# Altium PCB BOARD.PcbDoc
Units mil, origin at the board's own origin, x right, y up, seen from the top; angles counter-clockwise.
Board outline 615 x 1965 mil, 4 copper layers (Component Side, Signal Layer 1, Signal Layer 2, Solder Side), stack 33.234 mil thick; 56 components, 35 nets, 160 pads, 33 vias.
Unrouted connection lines stored in the file: 1.
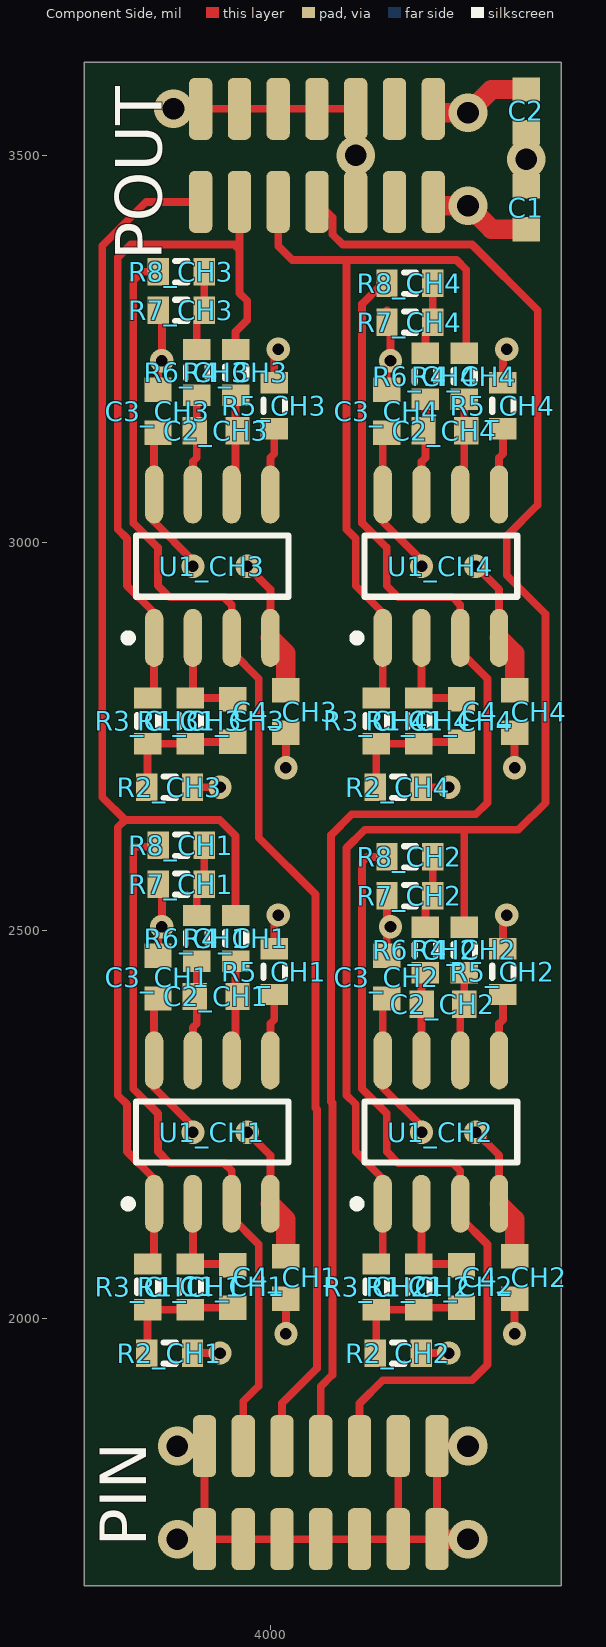
[diagram p0: Component Side view]
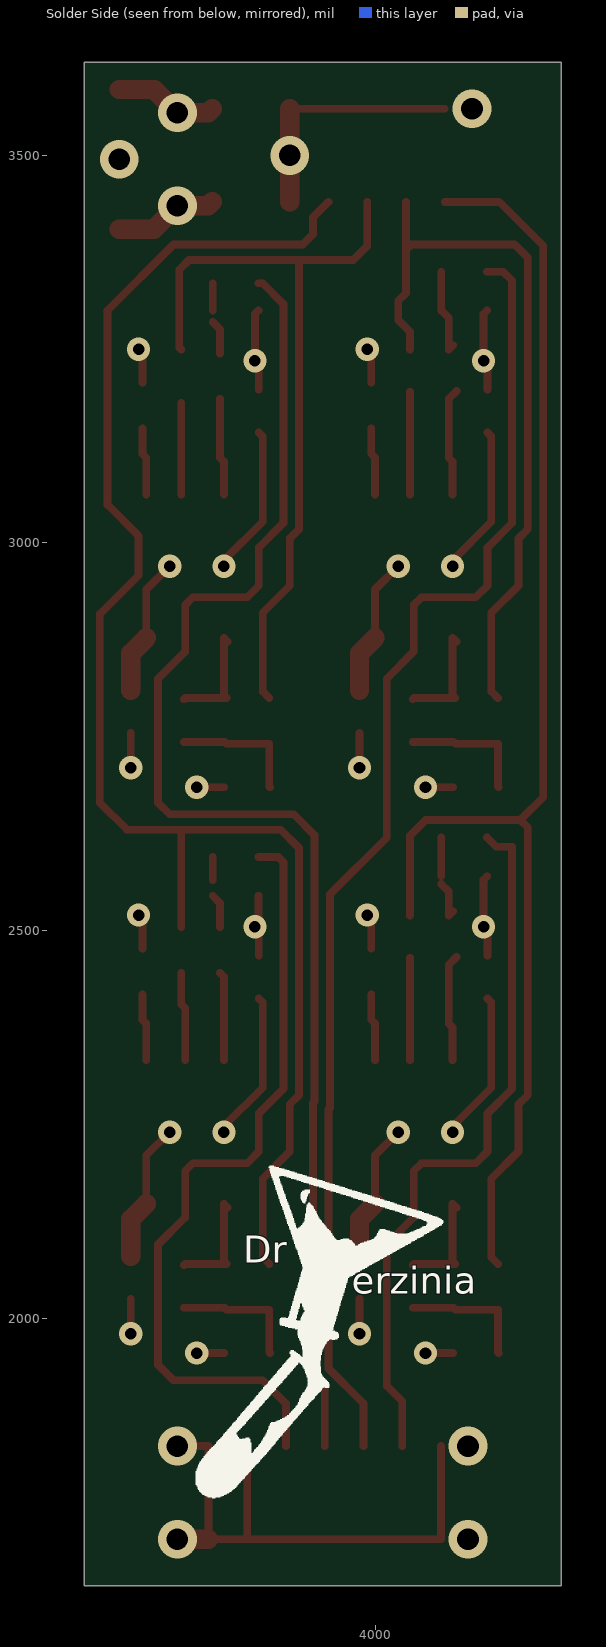
[diagram p1: Solder Side view, seen from below]
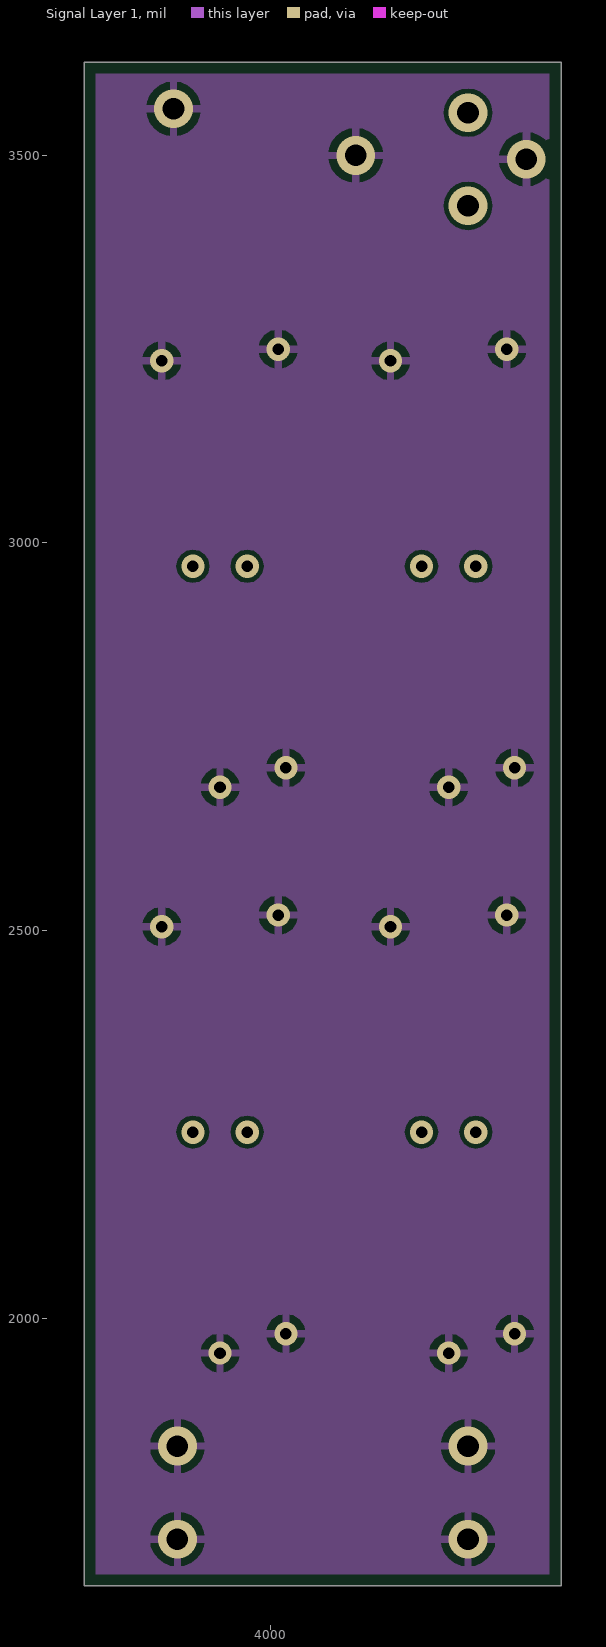
[diagram p2: Signal Layer 1]
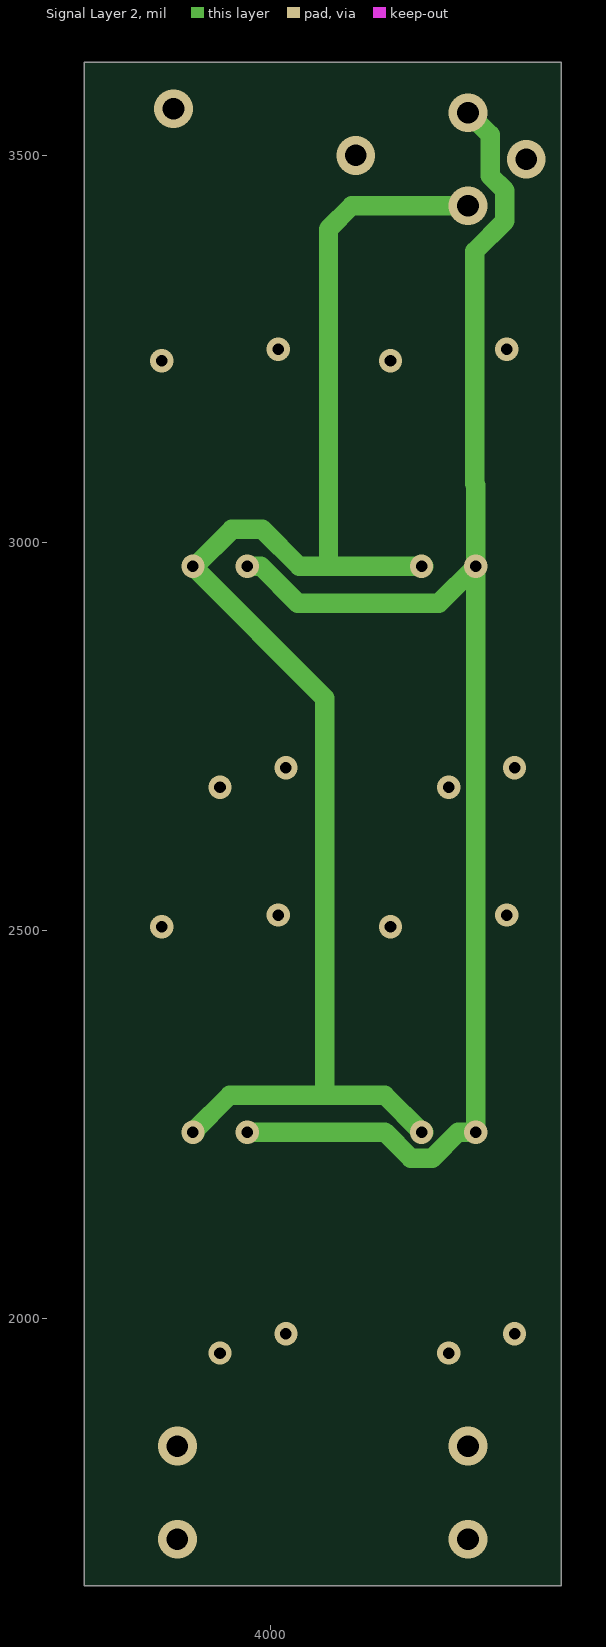
[diagram p3: Signal Layer 2]

## Layer stack, top to bottom
Top Solder: solder mask 0.4, Solder Resist, Dk 3.5
Component Side: signal copper 1.4
Dielectric 1: core 12.6, FR-4, Dk 4.8
Signal Layer 1: signal copper 1.417
Dielectric 3: prepreg 5, Dk 4.2
Signal Layer 2: signal copper 1.417
Dielectric 4: core 10, Dk 4.2
Solder Side: signal copper 1.4
Bottom Solder: solder mask 0.4, Solder Resist, Dk 3.5

## Board outline
3760,1655 3760,3620 4375,3620 4375,1655

## Design rules (kind name [scope] priority, off if disabled: settings)
Clearance [All] p1: gap=6 ignorepadtopadclearanceinfootprint=FALSE except(0: Arc-Hole Track-Hole SMDPad-Hole THPad-Hole Via-Hole Fill-Hole Poly-Hole Region-Hole Text-Hole)
PolygonConnect [All] p1: connectstyle=Relief reliefconductorwidth=10 reliefentries=4 polygonreliefangle="90 Angle" airgapwidth=10
RoomDefinition BOARD [InComponentClass('BOARD')] p1: confinementstyle=ConfineIn formatcopy=TRUE lockcomponents=FALSE outline 3760,3750 3495,3750 3495,3620 3760,3620
RoomDefinition CH4 [InComponentClass('CH4')] p2: confinementstyle=ConfineIn formatcopy=TRUE lockcomponents=FALSE outline 4075,2650 4345,2650 4345,3355 4075,3355
RoomDefinition U_CONNECTORS [InComponentClass('U_CONNECTORS')] p3: confinementstyle=ConfineIn formatcopy=TRUE lockcomponents=FALSE outline 3760,3480 3490,3480 3490,3620 3760,3620
RoomDefinition CH3 [InComponentClass('CH3')] p4: confinementstyle=ConfineIn formatcopy=TRUE lockcomponents=FALSE outline 3780,2650 4050,2650 4050,3355 3780,3355
RoomDefinition CH2 [InComponentClass('CH2')] p5: confinementstyle=ConfineIn formatcopy=TRUE lockcomponents=FALSE outline 4075,1920 4345,1920 4345,2625 4075,2625
RoomDefinition CH1 [InComponentClass('CH1')] p6: confinementstyle=ConfineIn formatcopy=TRUE lockcomponents=FALSE outline 3780,1920 4050,1920 4050,2625 3780,2625
RoutingVias [All] p1: holewidth=28 width=50 viastyle="Through Hole" minholewidth=10 minwidth=20 maxholewidth=28 maxwidth=50
SolderMaskExpansion [All] p1: expansion=4
Width [All] p1: maxlimit=30 minlimit=10 preferedwidth=30 toplayer_prefwidth=10 midlayer1_prefwidth=10 bottomlayer_prefwidth=10 minimp=50.000000 maximp=50.000000 favimp=50.000000
30 further rules are at their usual default settings.

## Classes and differential pairs
component class BOARD: C1 C2
component class CH1: C1_CH1 C2_CH1 C3_CH1 C4_CH1 R1_CH1 R2_CH1 R3_CH1 R4_CH1 R5_CH1 R6_CH1 R7_CH1 R8_CH1 U1_CH1
component class CH2: C1_CH2 C2_CH2 C3_CH2 C4_CH2 R1_CH2 R2_CH2 R3_CH2 R5_CH2 R6_CH2 R7_CH2 R8_CH2 U1_CH2
component class CH3: C1_CH3 C2_CH3 C3_CH3 C4_CH3 R1_CH3 R2_CH3 R3_CH3 R4_CH3 R5_CH3 R6_CH3 R7_CH3 R8_CH3 U1_CH3
component class CH4: C1_CH4 C2_CH4 C3_CH4 C4_CH4 R1_CH4 R2_CH4 R3_CH4 R4_CH4 R5_CH4 R6_CH4 R7_CH4 R8_CH4 U1_CH4
component class U_CONNECTORS: PIN POUT
net class IN[1..4]: IN1 IN2 IN3 IN4
net class OUT[1..4]: OUT1 OUT2 OUT3 OUT4
channel class CHANNEL: CH1 CH2 CH3 CH4

## Components (designator, comment, footprint, x,y, rotation, side; value= is the part's Value field where it differs from the comment)
C1 "Cap Semi" 1608[0603] 4330,3432.44 r270 top value=10uF
C1_CH1 "Cap Semi" 1608[0603] 3951.5,2040.94 r90 top value=2.7nF (schematic designator C1)
C1_CH2 "Cap Semi" 1608[0603] 4246.5,2040.94 r90 top value=2.7nF (schematic designator C1)
C1_CH3 "Cap Semi" 1608[0603] 3951.5,2770.94 r90 top value=2.7nF (schematic designator C1)
C1_CH4 "Cap Semi" 1608[0603] 4246.5,2770.94 r90 top value=2.7nF (schematic designator C1)
C2 "Cap Semi" 1608[0603] 4330,3557.44 r90 top value=10uF
C2_CH1 "Cap Semi" 1608[0603] 3930,2415 r0 top value=0.47uF (schematic designator C2)
C2_CH2 "Cap Semi" 1608[0603] 4222.56,2405 r0 top value=0.47uF (schematic designator C2)
C2_CH3 "Cap Semi" 1608[0603] 3930,3145 r0 top value=0.47uF (schematic designator C2)
C2_CH4 "Cap Semi" 1608[0603] 4225,3145 r0 top value=0.47uF (schematic designator C2)
C3_CH1 "Cap Semi" 1608[0603] 3855,2440 r270 top value=100nF (schematic designator C3)
C3_CH2 "Cap Semi" 1608[0603] 4150,2440 r270 top value=100nF (schematic designator C3)
C3_CH3 "Cap Semi" 1608[0603] 3855,3170 r270 top value=100nF (schematic designator C3)
C3_CH4 "Cap Semi" 1608[0603] 4150,3170 r270 top value=100nF (schematic designator C3)
C4_CH1 "Cap Semi" 1608[0603] 4020,2052.56 r90 top value=100nF (schematic designator C4)
C4_CH2 "Cap Semi" 1608[0603] 4315,2052.56 r90 top value=100nF (schematic designator C4)
C4_CH3 "Cap Semi" 1608[0603] 4020,2782.56 r90 top value=100nF (schematic designator C4)
C4_CH4 "Cap Semi" 1608[0603] 4315,2782.56 r90 top value=100nF (schematic designator C4)
PIN "Header 7X2" CONN_14x2_0.5IN 4065,1775 r180 top
POUT "Header 7X2" CONN_14x2_0.5IN 4060,3500 r180 top
R1_CH1 "Res3" J1-0603 3896.5,2040.47 r90 top value=100M (schematic designator R1)
R1_CH2 "Res3" J1-0603 4191.5,2040.47 r90 top value=100M (schematic designator R1)
R1_CH3 "Res3" J1-0603 3896.5,2770.47 r90 top value=100M (schematic designator R1)
R1_CH4 "Res3" J1-0603 4191.5,2770.47 r90 top value=100M (schematic designator R1)
R2_CH1 "Res3" J1-0603 3870,1955 r180 top value=200 (schematic designator R2)
R2_CH2 "Res3" J1-0603 4165,1955 r180 top value=200 (schematic designator R2)
R2_CH3 "Res3" J1-0603 3870,2685 r180 top value=200 (schematic designator R2)
R2_CH4 "Res3" J1-0603 4165,2685 r180 top value=200 (schematic designator R2)
R3_CH1 "Res3" J1-0603 3841.5,2040.47 r90 top value=3.9k (schematic designator R3)
R3_CH2 "Res3" J1-0603 4136.5,2040.47 r90 top value=3.9k (schematic designator R3)
R3_CH3 "Res3" J1-0603 3841.5,2770.47 r90 top value=3.9k (schematic designator R3)
R3_CH4 "Res3" J1-0603 4136.5,2770.47 r90 top value=3.9k (schematic designator R3)
R4_CH1 "Res3" J1-0603 3955,2490 r90 top value=1M (schematic designator R4)
R4_CH2 "Res3" J1-0603 4250,2475 r90 top value=1M (schematic designator R4)
R4_CH3 "Res3" J1-0603 3955,3220 r90 top value=1M (schematic designator R4)
R4_CH4 "Res3" J1-0603 4250,3215 r90 top value=1M (schematic designator R4)
R5_CH1 "Res3" J1-0603 4005,2447.09 r90 top value=1M (schematic designator R5)
R5_CH2 "Res3" J1-0603 4300,2447.09 r90 top value=1M (schematic designator R5)
R5_CH3 "Res3" J1-0603 4005,3177.09 r90 top value=1M (schematic designator R5)
R5_CH4 "Res3" J1-0603 4300,3177.09 r90 top value=1M (schematic designator R5)
R6_CH1 "Res3" J1-0603 3905,2490 r270 top value=100k (schematic designator R6)
R6_CH2 "Res3" J1-0603 4200,2475 r270 top value=100k (schematic designator R6)
R6_CH3 "Res3" J1-0603 3905,3220 r270 top value=100k (schematic designator R6)
R6_CH4 "Res3" J1-0603 4200,3215 r270 top value=100k (schematic designator R6)
R7_CH1 "Res3" J1-0603 3885,2560 r0 top value=1M (schematic designator R7)
R7_CH2 "Res3" J1-0603 4180,2545 r0 top value=1M (schematic designator R7)
R7_CH3 "Res3" J1-0603 3885,3300 r0 top value=1M (schematic designator R7)
R7_CH4 "Res3" J1-0603 4180,3285 r0 top value=1M (schematic designator R7)
R8_CH1 "Res3" J1-0603 3885,2610 r180 top value=100M (schematic designator R8)
R8_CH2 "Res3" J1-0603 4180,2595 r180 top value=100M (schematic designator R8)
R8_CH3 "Res3" J1-0603 3885,3350 r180 top value=100M (schematic designator R8)
R8_CH4 "Res3" J1-0603 4180,3335 r180 top value=100M (schematic designator R8)
U1_CH1 "LT1113" SO8_L 3925,2240.08 r90 top (schematic designator U1)
U1_CH2 "LT1113" SO8_L 4220,2240.08 r90 top (schematic designator U1)
U1_CH3 "LT1113" SO8_L 3925,2970.08 r90 top (schematic designator U1)
U1_CH4 "LT1113" SO8_L 4220,2970.08 r90 top (schematic designator U1)

## Footprints (in the part's own frame and the unit in brackets; to place one, negate y for a bottom-side part, rotate by r counter-clockwise, add the part's x,y. Pads: shape width x height; smd on the part's side, far side on the other; paste and mask are expansions set on the pad)
1608[0603] [mm] "Chip Capacitor, Body 1.6x0.8mm, IPC High Density"
  rect 0.8x0.9 smd: 1(-0.7,0) 2(0.7,0)
  body extent -0.87,-0.48 0.87,0.48, height 1.3
CONN_14x2_0.5IN [mil]
  rrect50% 30x80 smd: 1(150,60) 2(150,-60) 3(100,60) 4(100,-60) 5(50,60) 6(50,-60) 7(0,60) 8(0,-60) 9(-50,60) 10(-50,-60) 11(-100,60) 12(-100,-60) 13(-150,60) 14(-150,-60)
J1-0603 [mm] "Chip Resistor, Body 1.6x0.8mm, IPC High Density"
  rect 0.7x0.9 smd: 1(-0.75,0) 2(0.75,0)
  silkscreen extent -0.2,-0.35 0.2,0.35, body extent -0.85,-0.48 0.85,0.48, height 0.9
SO8_L [mm] "SOIC, 8-Leads, Body 4.9x3.9mm, Pitch 1.27mm, IPC High Density"
  oval 1.9x0.6 smd: 1(-2.35,1.905) 2(-2.35,0.635) 3(-2.35,-0.635) 4(-2.35,-1.905) 5(2.35,-1.905) 6(2.35,-0.635) 7(2.35,0.635) 8(2.35,1.905)
  silkscreen extent -2.47,-2.5 1,2.88, body extent -2,-2.5 2,2.5, height 1.75

## Part data
C1 C1_CH1 C1_CH2 C1_CH3 C1_CH4 C2 C2_CH1 C2_CH2 C2_CH3 C2_CH4 C3_CH1 C3_CH2 C3_CH3 C3_CH4 C4_CH1 C4_CH2 C4_CH3 C4_CH4: "Capacitor (Semiconductor SIM Model)", LatestRevisionDate=29-May-2009, LatestRevisionNote="IPC-7351 Footprint Added.", PackageDescription="Chip Capacitor", PackageReference=C1206, Published=8-Jun-2000, Publisher="Altium Limited"
PIN POUT: "Header, 7-Pin, Dual row", LatestRevisionDate=17-Jul-2002, LatestRevisionNote="Re-released for DXP Platform.", Publisher="Altium Limited"
R1_CH1 R1_CH2 R1_CH3 R1_CH4 R2_CH1 R2_CH2 R2_CH3 R2_CH4 R3_CH1 R3_CH2 R3_CH3 R3_CH4 R4_CH1 R4_CH2 R4_CH3 R4_CH4 R5_CH1 R5_CH2 R5_CH3 R5_CH4 R6_CH1 R6_CH2 R6_CH3 R6_CH4 R7_CH1 R7_CH2 R7_CH3 R7_CH4 R8_CH1 R8_CH2 R8_CH3 R8_CH4: "Resistor", LatestRevisionDate=29-May-2009, LatestRevisionNote="IPC-7351 Footprint Added.", PackageDescription="Chip Resistor", PackageReference=J1-0603, Published=8-Jun-2000, Publisher="Altium Limited"
U1_CH1 U1_CH2 U1_CH3 U1_CH4: "LT1113 Opamp"

## Via types
v1: diameter 30, hole 15, Component Side to Solder Side, 24 vias
v2: diameter 50, hole 28, Component Side to Solder Side, 9 vias

## Nets (pads, with @x,y where several pads share a name; then routed paths per layer and width w, separated by ;. In a path a pad name is that pad's centre, name@x,y a point inside that pad or via, vN(x,y) a via of type N, cw(c..) or ccw(c..) an arc to the next point about the centre after c; other vN are vias at no path point)
5V: C1.2 C3_CH1.2 C3_CH2.2 C3_CH3.2 C3_CH4.2 POUT.13 U1_CH1.8 U1_CH2.8 U1_CH3.8 U1_CH4.8 | length 2973
  Component Side w10: C3_CH1.2 3850,2407.44 U1_CH1.8 3850,2297.38 3900,2247.38 v1(3900,2240) ; C3_CH3.2 3850,3137.44 U1_CH3.8 3850,3027.38 3900,2977.38 v1(3900,2970) ; C3_CH2.2 4145,2407.44 U1_CH2.8 4145,2297.38 4195,2247.38 v1(4195,2240) ; C3_CH4.2 4145,3137.44 U1_CH4.8 4145,3027.38 4195,2977.38 v1(4195,2970)
  Component Side w25: POUT.13 4215,3435 v2(4255,3435) 4285.12,3404.88 C1.2
  Signal Layer 2 w25: v1@3902.82,2240 v1(3900,2240) 3947.5,2287.5 4070,2287.5 ; v1@4197.82,2240 v1(4195,2240) 4147.5,2287.5 4070,2287.5 ; v1@4197.82,2970 v1(4195,2970) 4075,2970 ; v2(4255,3435) 4105,3435 4075,3405 4075,2970 ; 4070,2287.5 4070,2800 v1(3900,2970) 3902.82,2970 3950.32,3017.5 3989.68,3017.5 4037.18,2970 4075,2970
-5V: C2.2 C4_CH1.2 C4_CH2.2 C4_CH3.2 C4_CH4.2 POUT.14 U1_CH1.4 U1_CH2.4 U1_CH3.4 U1_CH4.4 | length 2865.3
  Component Side w10: v1(3970,2240) 4000,2210 U1_CH1.4 ; v1(3970,2970) 4000,2940 U1_CH3.4 ; v1(4265,2240) 4295,2210 U1_CH2.4 ; v1(4265,2970) 4295,2940 U1_CH4.4
  Component Side w25: U1_CH1.4 4020,2127.56 C4_CH1.2 ; U1_CH3.4 4020,2857.56 C4_CH3.2 ; POUT.14 4215,3555 v2(4255,3555) 4285,3585 C2.2 ; U1_CH2.4 4315,2127.56 C4_CH2.2 ; U1_CH4.4 4315,2857.56 C4_CH4.2
  Signal Layer 2 w25: v1(3970,2240) 4147.62,2240 4181.12,2206.5 4208.88,2206.5 4242.38,2240 v1(4265,2240) v1(4265,2970) ; v1(3970,2970) 3987.68,2970 4035.18,2922.5 4217.5,2922.5 v1(4265,2970) ; v2(4255,3555) 4283.59,3526.41 4283.59,3473.59 4302.5,3454.68 4302.5,3415.32 4263.59,3376.41 4263.59,3076.09 4265,3074.68 v1(4265,2970)
GND: C1.1 C2.1 C3_CH1.1 C3_CH2.1 C3_CH3.1 C3_CH4.1 C4_CH1.1 C4_CH2.1 C4_CH3.1 C4_CH4.1 PIN.1 PIN.2 PIN.3 PIN.5 PIN.7 PIN.9 PIN.11 PIN.12 PIN.13 PIN.14 POUT.2 POUT.4 POUT.6 POUT.8 POUT.9 POUT.10 R2_CH1.1 R2_CH2.1 R2_CH3.1 R2_CH4.1 R5_CH1.2 R5_CH2.2 R5_CH3.2 R5_CH4.2 R7_CH1.1 R7_CH2.1 R7_CH3.1 R7_CH4.1 | length 1919.3
  Component Side w10: C3_CH1.1 3855,2500 v1(3860,2505) 3860,2565.47 R7_CH1.1@3855.47,2570 ; C3_CH3.1 3855,3230 v1(3860,3235) 3860,3295.47 R7_CH3.1 ; R2_CH1.1 v1(3935,1955) ; R2_CH3.1 v1(3935,2685) ; POUT.2 POUT.4 POUT.6 POUT.8 POUT.10 ; PIN.2 PIN.1 PIN.3 PIN.5 PIN.7 PIN.9 PIN.11 ; R5_CH1.2 4005,2515 v1(4010,2520) ; R5_CH3.2 4005,3245 v1(4010,3250) ; v1(4020,1980) C4_CH1.1 ; v1(4020,2710) C4_CH3.1 ; C3_CH2.1 4150,2500 v1(4155,2505) 4150.47,2509.53 R7_CH2.1 ; C3_CH4.1 4150,3230 v1(4155,3235) 4155,3295.47 R7_CH4.1@4150.47,3300 ; PIN.12 PIN.11 ; R2_CH2.1 v1(4230,1955) ; R2_CH4.1 v1(4230,2685) ; v2(4255,1835) PIN.14 PIN.13 PIN.11 ; R5_CH2.2 4300,2515 v1(4305,2520) ; R5_CH4.2 4300,3245 v1(4305,3250) ; v1(4315,1980) C4_CH2.1
  Component Side w25: POUT.9 v2(4110,3500) POUT.10 ; PIN.13 v2(4255,1715)
  other v1: 4315,2710
  other v2: 3880,1715 3880,1835 4330,3495 3875,3560
IN1: PIN.4 R8_CH1.2 U1_CH1.3 | length 926.7
  Component Side w10: R8_CH1.2@3855.47,2620 3843.66,2608.19 3823.19,2608.19 3823.19,2295.9 3855,2264.09 3855,2215 3870,2200 3940,2200 3950,2190 3950,2130 3985,2095 3985,1912.68 3965,1892.68 PIN.4
IN2: PIN.10 R8_CH2.2 U1_CH2.3 | length 1032
  Component Side w10: PIN.10 4115,1890 4145,1920 4260,1920 4280,1940 4280,2095 4245,2130 4245,2190 4235,2200 4165,2200 4150,2215 4150,2264.09 4118.19,2295.9 4118.19,2588.19 4125,2595 R8_CH2.2
IN3: PIN.6 R8_CH3.2 U1_CH3.3 | length 1698.1
  Component Side w10: R8_CH3.2 3835,3350 3823.19,3338.19 3823.19,3025.9 3855,2994.09 3855,2945 3870,2930 3940,2930 3950,2920 3950,2860 3985,2825 3985,2620 4058.19,2546.81 4058.19,2271.05 4060,2269.24 4060,1935.15 4015,1890.15 PIN.6
IN4: PIN.8 R8_CH4.2 U1_CH4.3 | length 1808.9
  Component Side w10: PIN.8 4065,1911.86 4080,1926.86 4080,2277.52 4078.19,2279.33 4078.19,2385.86 4078.19,2623.19 4105,2650 4265,2650 4280,2665 4280,2825 4245,2860 U1_CH4.3 4245,2920 4235,2930 4165,2930 4150,2945 4150,2994.09 4118.19,3025.9 4118.19,3308.19 4145,3335 R8_CH4.2
NetC1_CH1_1: C1_CH1.1 R1_CH1.1 R2_CH1.2 R3_CH1.1 | length 167.4
  Component Side w10: R2_CH1.2 3841.5,1956.02 R3_CH1.1 R1_CH1.1 3898.94,2013.39 C1_CH1.1
NetC1_CH1_2: C1_CH1.2 R1_CH1.2 U1_CH1.2 | length 141.7
  Component Side w10: U1_CH1.2@3895,2142.56 U1_CH1.2 3900,2073.5 R1_CH1.2 3950,2070 C1_CH1.2
NetC1_CH2_1: C1_CH2.1 R1_CH2.1 R2_CH2.2 R3_CH2.1 | length 167.4
  Component Side w10: R2_CH2.2 4136.5,1956.02 R3_CH2.1 R1_CH2.1 4193.94,2013.39 C1_CH2.1
NetC1_CH2_2: C1_CH2.2 R1_CH2.2 U1_CH2.2 | length 141.7
  Component Side w10: U1_CH2.2@4190,2142.56 U1_CH2.2 4195,2073.5 R1_CH2.2 4245,2070 C1_CH2.2
NetC1_CH3_1: C1_CH3.1 R1_CH3.1 R2_CH3.2 R3_CH3.1 | length 167.4
  Component Side w10: R2_CH3.2 3841.5,2686.02 R3_CH3.1 R1_CH3.1 3898.94,2743.39 C1_CH3.1
NetC1_CH3_2: C1_CH3.2 R1_CH3.2 U1_CH3.2 | length 141.7
  Component Side w10: U1_CH3.2@3895,2872.56 U1_CH3.2 3900,2803.5 R1_CH3.2 3950,2800 C1_CH3.2
NetC1_CH4_1: C1_CH4.1 R1_CH4.1 R2_CH4.2 R3_CH4.1 | length 167.4
  Component Side w10: R2_CH4.2 4136.5,2686.02 R3_CH4.1 R1_CH4.1 4193.94,2743.39 C1_CH4.1
NetC1_CH4_2: C1_CH4.2 R1_CH4.2 U1_CH4.2 | length 141.7
  Component Side w10: U1_CH4.2@4190,2872.56 U1_CH4.2 4195,2803.5 R1_CH4.2 4245,2800 C1_CH4.2
NetC2_CH1_1: C2_CH1.1 R6_CH1.2 U1_CH1.7 | length 139.6
  Component Side w10: R6_CH1.2@3895,2465.94 3905,2455.94 3905,2380 3900,2375 U1_CH1.7
NetC2_CH1_2: C2_CH1.2 R4_CH1.1 U1_CH1.6 | length 132.4
  Component Side w10: U1_CH1.6@3955,2332.6 R4_CH1.1@3955,2465
NetC2_CH2_1: C2_CH2.1 R6_CH2.2 U1_CH2.7 | length 114.9
  Component Side w10: U1_CH2.7 C2_CH2.1 4195,2440.47 R6_CH2.2
NetC2_CH2_2: C2_CH2.2 R4_CH2.1 U1_CH2.6 | length 115
  Component Side w10: U1_CH2.6 4245,2399.88 C2_CH2.2 4250.12,2445.35 R4_CH2.1
NetC2_CH3_1: C2_CH3.1 R6_CH3.2 U1_CH3.7 | length 139.6
  Component Side w10: R6_CH3.2@3895,3195.94 3905,3185.94 3905,3110 3900,3105 U1_CH3.7
NetC2_CH3_2: C2_CH3.2 R4_CH3.1 U1_CH3.6 | length 132.4
  Component Side w10: U1_CH3.6@3955,3062.6 R4_CH3.1@3955,3195
NetC2_CH4_1: C2_CH4.1 R6_CH4.2 U1_CH4.7 | length 125.4
  Component Side w10: U1_CH4.7 4195,3105 4200,3110 R6_CH4.2@4200,3185.94
NetC2_CH4_2: C2_CH4.2 R4_CH4.1 U1_CH4.6 | length 117.9
  Component Side w10: U1_CH4.6@4250,3062.6 R4_CH4.1@4250,3180.47
NetR5_CH1_1: R5_CH1.1 U1_CH1.5 | length 87
  Component Side w10: U1_CH1.5 4000,2380 4005,2385 R5_CH1.1
NetR5_CH2_1: R5_CH2.1 U1_CH2.5 | length 87
  Component Side w10: U1_CH2.5 4295,2380 4300,2385 R5_CH2.1
NetR5_CH3_1: R5_CH3.1 U1_CH3.5 | length 87
  Component Side w10: U1_CH3.5 4000,3110 4005,3115 R5_CH3.1
NetR5_CH4_1: R5_CH4.1 U1_CH4.5 | length 87
  Component Side w10: U1_CH4.5 4295,3110 4300,3115 R5_CH4.1
NetR6_CH1_1: R6_CH1.1 R7_CH1.2 R8_CH1.1 | length 101.5
  Component Side w10: R6_CH1.1@3899.53,2525 R6_CH1.1@3904.53,2520 ; R6_CH1.1 3905,2550.47 R7_CH1.2 ; R7_CH1.2@3914.53,2570 R8_CH1.1 R8_CH1.1@3914.53,2620
NetR6_CH2_1: R6_CH2.1 R7_CH2.2 R8_CH2.1 | length 74.4
  Component Side w10: R6_CH2.1 4200,2535.47 R7_CH2.2 ; 4209.53,2565 R8_CH2.1
NetR6_CH3_1: R6_CH3.1 R7_CH3.2 R8_CH3.1 | length 111.5
  Component Side w10: R6_CH3.1@3899.53,3255 R6_CH3.1@3904.53,3250 ; R6_CH3.1 3905,3290.47 R7_CH3.2 R8_CH3.1
NetR6_CH4_1: R6_CH4.1 R7_CH4.2 R8_CH4.1 | length 79.4
  Component Side w10: R6_CH4.1 4200,3275.47 R7_CH4.2 ; R7_CH4.2@4209.53,3300 R8_CH4.1
OUT1: POUT.1 R3_CH1.2 R4_CH1.2 U1_CH1.1 | length 1756.1
  Component Side w10: R3_CH1.2 3850,2078.5 3850,2180 3815,2215 3815,2275.81 3803.19,2287.62 3803.19,2633.19 3812.72,2642.72 ; POUT.1 3840,3440 3783.19,3383.19 3783.19,2672.24 3812.72,2642.72 ; R4_CH1.2 3955,2622.24 3934.52,2642.72 3812.72,2642.72
OUT2: POUT.7 R3_CH2.2 R4_CH2.2 U1_CH2.1 | length 1993.9
  Component Side w10: POUT.7 4080,3420 4080,3398.18 4093.18,3385 4260,3385 4345,3300 4345,3049.09 4305,3009.09 4305,2958.28 4355,2908.28 4355,2665.15 4319.85,2630 4250,2630 ; R3_CH2.2 4145,2078.5 4145,2180 4110,2215 4110,2275.81 4098.19,2287.62 4098.19,2606.47 4121.72,2630 4250,2630 ; R4_CH2.2 4250,2630
OUT3: POUT.3 R3_CH3.2 R4_CH3.2 U1_CH3.1 | length 958.4
  Component Side w10: R3_CH3.2 3850,2808.5 3850,2910 3815,2945 3815,3005.81 3803.19,3017.62 3803.19,3368.19 3820,3385 3953.43,3385 3960,3378.43 ; R4_CH3.2 3955,3272.57 3970,3287.57 3970,3312.43 3960,3322.43 3960,3378.43 ; POUT.3 3960,3378.43
OUT4: POUT.5 R3_CH4.2 R4_CH4.2 U1_CH4.1 | length 1004.7
  Component Side w10: POUT.5 4010,3383.14 4028.14,3365 4100,3365 ; R3_CH4.2 4145,2808.5 U1_CH4.1 4145,2910 4110,2945 4110,3005.81 4098.19,3017.62 4098.19,3363.19 4100,3365 ; R4_CH4.2@4250,3249.53 4252.5,3252.03 4252.5,3352.5 4240,3365 4100,3365
pads on no net: POUT.11 POUT.12
copper on no net: | length 45
  Component Side w10: 4315,2710 4315,2755

## Polygon pours and split planes (outlines as drawn)
GND on Signal Layer 1 "GNDPlane" (solid, remove dead copper, pour order 0): 3775,1670 3775,3605 4360,3605 4360,1670

## Silkscreen, mask and mechanical layers (free items; w line width, h text height)
Bottom Overlay:
  drawing of 735 lines, arcs and shapes, not listed
  text "Dr" at 4170,2060 h60
  text "erzinia" at 4030,2020 h60
Mechanical 1:
  the board outline again, w10